# Altium PCB Logic_Controller_REV1.PcbDoc (part 2 of 2)
Units mm, origin at the board's own origin, x right, y up, seen from the top; angles counter-clockwise.
Board outline 67.13 x 101.6 mm, 4 copper layers (Top Layer, GND, PWR, Bottom Layer), stack 1.586 mm thick; 118 components, 76 nets, 360 pads, 221 vias.
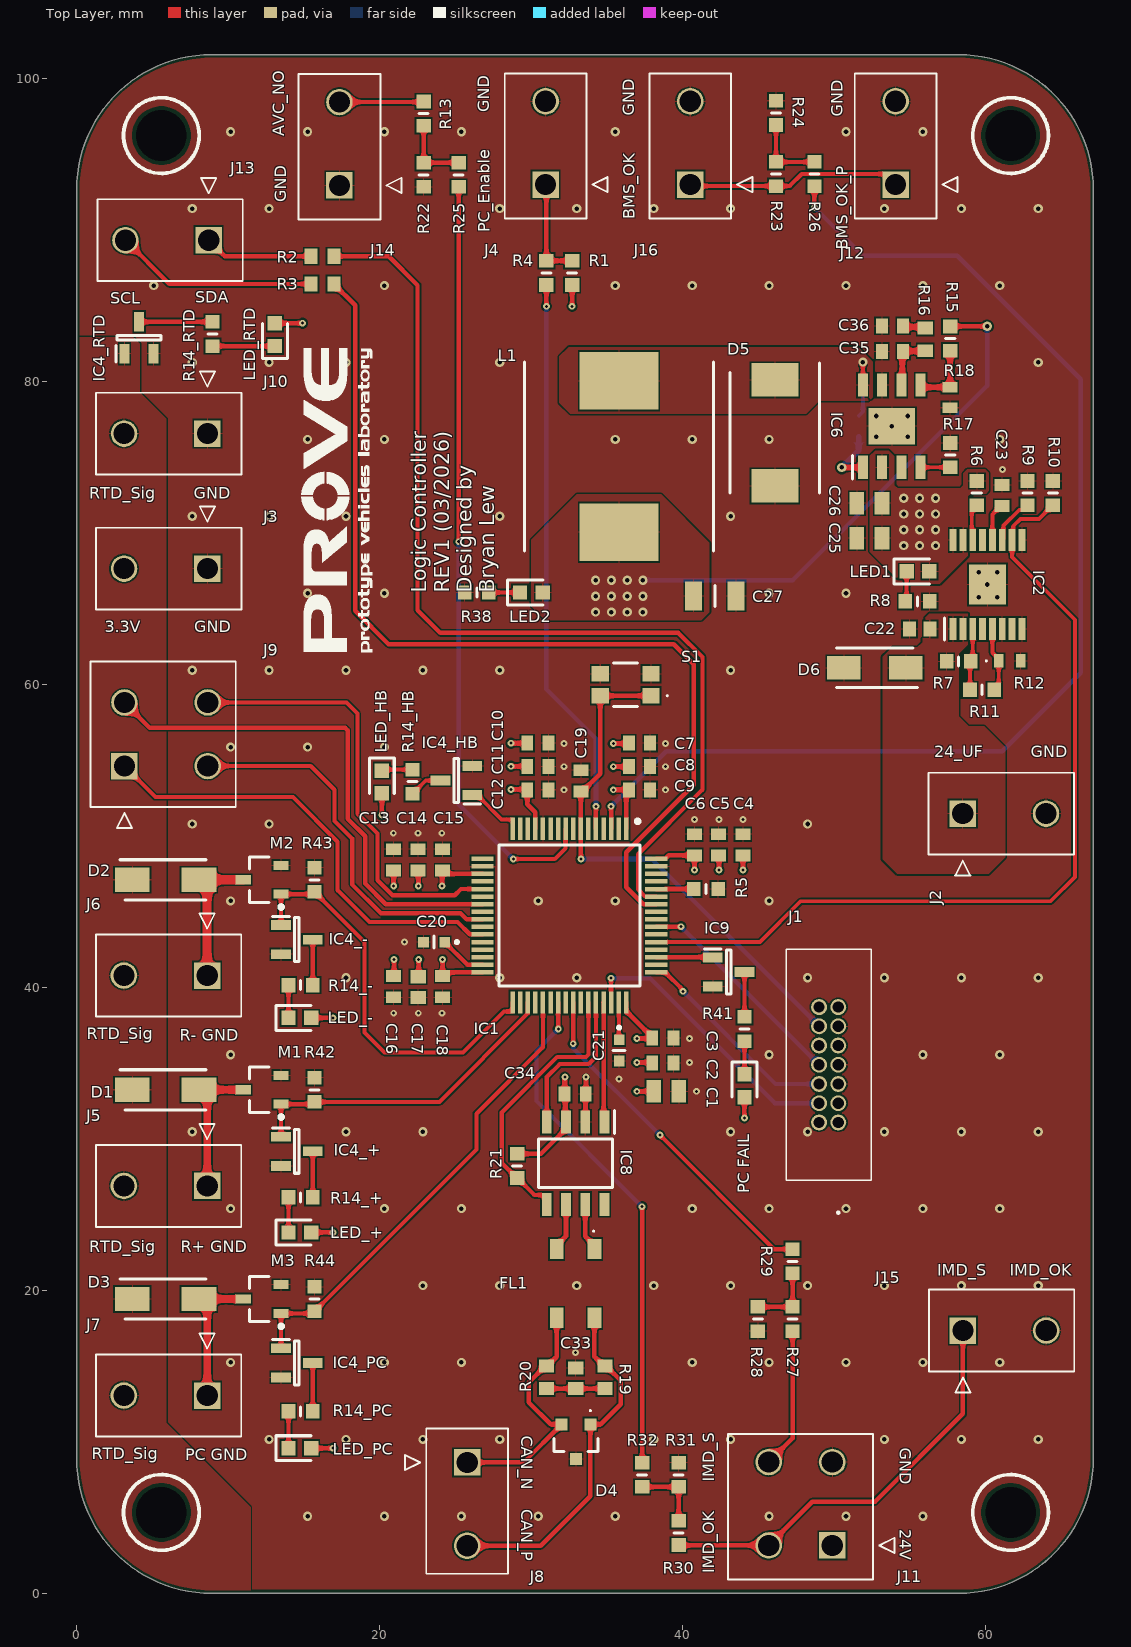
[diagram p0: Top Layer view]

## Via types
v1: diameter 0.61, hole 0.3, Top Layer to Bottom Layer, tented both sides, 121 vias
v2: diameter 0.45, hole 0.2, Top Layer to Bottom Layer, 63 vias
v3: diameter 0.61, hole 0.3, Top Layer to Bottom Layer, 37 vias

## Nets (pads, with @x,y where several pads share a name; then routed paths per layer and width w, separated by ;. In a path a pad name is that pad's centre, name@x,y a point inside that pad or via, vN(x,y) a via of type N, cw(c..) or ccw(c..) an arc to the next point about the centre after c; other vN are vias at no path point) (continued)
SWCLK: (continued)
  Bottom Layer w0.279: v2(40.03,39.751) 46.152,33.63 J1.6
SWDIO: IC1.46 J1.4 | length 18.8
  Top Layer w0.279: v2(35.281,40.615) 35.284,40.611 35.284,39.02 IC1.46
  Bottom Layer w0.279: v2(35.281,40.615) 37.846,40.615 46.101,32.36 J1.4
SWO: IC1.55 J1.8 | length 14.5
  Top Layer w0.279: IC1.55 38.286,44.015 39.256,44.015 39.259,44.018 v2(39.903,44.018)
  Bottom Layer w0.279: v2(39.903,44.018) J1.8
UVLO: IC2.3 R7.2 R11.1 | length 4.1
  Top Layer w0.254: R11.1 58.992,61.494 R7.2 59.167,61.669 IC2.3
VCAP1: C20.1 IC1.31 | length 3.1
  Top Layer w0.279: C20.1 25.794,41.505 IC1.31
VCAP2: C21.1 IC1.47 | length 2.5
  Top Layer w0.254: IC1.47 35.801,39.003 35.801,36.564 C21.1
pads on no net: IC1.2 IC1.4 IC1.6 IC1.8 IC1.10 IC1.11 IC1.14 IC1.15 IC1.17 IC1.20 IC1.22 IC1.24 IC1.26 IC1.28 IC1.29 IC1.30 IC1.34 IC1.36 IC1.38 IC1.40 IC1.42 IC1.50 IC1.52 IC1.54 IC1.56 IC1.57 IC1.61 IC1.62 IC2.4 IC2.7 IC2.13 IC6.3 IC8.8 J1.1 J1.2 J1.9 J1.10 J1.13 J1.14

## Polygon pours and split planes (outlines as drawn)
GND on Bottom Layer "Top Layer-GND" (solid, pour order 42): 0.051,9.141 0.051,0.251 8.941,0.251 67.132,0.251 67.132,101.638 0.051,101.851
3.3V on Top Layer "3.3V" (solid, pour order 37): 33.02,72.568 30.023,69.571 30.023,65.176 30.937,64.262 41.25,64.262 41.783,64.795 41.783,69.367 38.583,72.568
RTD_Sig on Top Layer "NONET_L-01_P-001" (solid, pour order 30): 0,0 0,82.956 3.734,82.956 4.166,82.525 4.166,79.299 5.918,77.546 5.918,11.252 11.481,5.69 11.481,0
SW on Top Layer "NONET_L-01_P-001" (solid, pour order 33): 32.487,82.296 31.877,81.686 31.877,78.613 32.588,77.902 48.158,77.902 49.022,78.765 52.349,78.765 52.578,78.994 52.578,81.331 51.613,82.296
"24V Unfused" on Top Layer "NONET_L-01_P-001" (solid, pour order 40): 53.213,48.463 54.178,47.498 60.223,47.498 61.316,48.59 61.316,55.855 59.919,57.252 58.903,57.252 58.242,57.912 58.242,62.027 58.852,62.636 58.852,64.695 56.31,64.695 55.855,64.233 55.855,62.796 55.515,62.457 53.851,62.457 53.213,61.849
24V on Top Layer "NONET_L-01_P-001" (solid, pour order 38): 52.73,75.463 52.375,75.108 52.375,72.923 52.375,68.783 54.508,66.65 56.998,66.65 58.852,68.504 58.852,72.441 59.03,72.619 60.046,72.619 60.223,72.796 60.223,73.99 59.995,74.219 58.801,74.219 58.547,73.965 58.547,73.177 58.344,72.974 54.204,72.974 54,73.177 54,75.07 53.607,75.463
GND on Top Layer "Top Layer-GND" (solid, pour order 41): 0.049,9.147 0.049,0.257 8.939,0.257 67.132,0.257 67.132,101.644 0.049,101.857
24V on PWR "24V" (solid, pour order 35): 39.499,0.022 67.109,-0.003 67.134,0.022 67.134,46.758 67.134,75.257 51.488,75.257 46.634,70.403 46.634,38.886 53.266,32.255 53.266,19.199 50.193,16.126 41.557,16.126 39.499,14.779
3.3V on PWR "3.3V" (solid, pour order 36): 0,0 0,101.625 67.132,101.625 67.132,0
GND on GND "Top Layer-GND" (solid, pour order 31): 0.05,9.148 0.05,0.258 8.94,0.258 67.132,0.258 67.132,101.645 0.05,101.858

## Silkscreen, mask and mechanical layers (free items; w line width, h text height)
Top Overlay:
  drawing of 40 lines, arcs and shapes, not listed
  text "GND" at 27.254,97.816 h0.76 r90
  text "GND" at 36.83,97.587 h0.76 r90
  text "GND" at 50.571,97.511 h0.76 r90
  text "AVC_NO" at 13.691,96.216 h0.76 r90
  text "GND" at 13.818,91.872 h0.76 r90
  text "BMS_OK" at 36.855,90.729 h0.76 r90
  text "PC_Enable" at 27.28,89.879 h0.76 r90
  text "BMS_OK_P" at 50.902,88.724 h0.76 r90
  text "SDA" at 7.824,85.217 h0.76
  text "SCL" at 2.21,85.141 h0.76
  text "RTD_Sig" at 0.826,72.288 h0.76
  text "GND" at 7.722,72.288 h0.76
  text "Logic Controller / REV1 (03/2026) / Designed by / Bryan Lew" at 27.584,66.065 h1 r90
  text "3.3V" at 1.842,63.449 h0.76
  text "GND" at 7.773,63.449 h0.76
  text "24_UF" at 56.617,55.22 h0.76
  text "GND" at 62.992,55.22 h0.76
  text "RTD_Sig" at 0.674,36.576 h0.76
  text "R- GND" at 6.808,36.474 h0.76
  text "RTD_Sig" at 0.826,22.53 h0.76
  text "R+ GND" at 6.859,22.504 h0.76
  text "IMD_S" at 56.833,20.955 h0.76
  text "IMD_OK" at 61.608,20.955 h0.76
  text "CAN_N" at 29.362,10.388 h0.76 r270
  text "GND" at 54.356,9.601 h0.76 r270
  text "RTD_Sig" at 1.004,8.839 h0.76
  text "PC GND" at 7.163,8.788 h0.76
  text "IMD_S" at 42.088,7.354 h0.76 r90
  text "CAN_P" at 29.362,5.562 h0.76 r270
  text "24V" at 54.356,4.216 h0.76 r270
  text "IMD_OK" at 42.088,1.334 h0.76 r90
Mechanical 1:
  the board outline again, w0.254